# EAGLE board Schaltplan_Test (EAGLE 8.2.1)
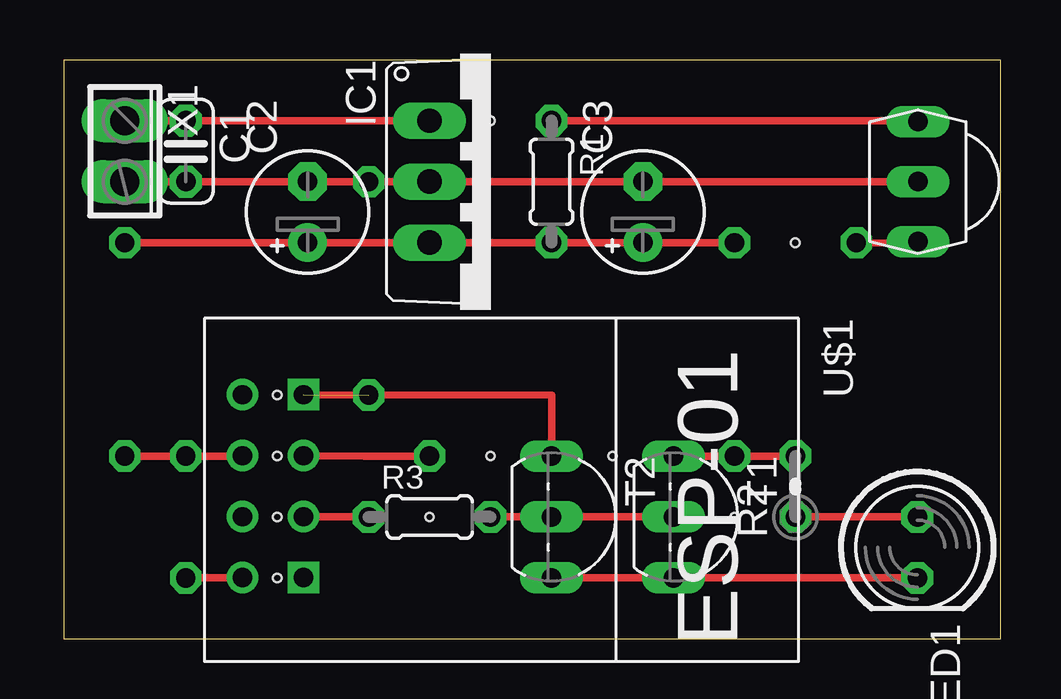
[diagram p0: board, top side]
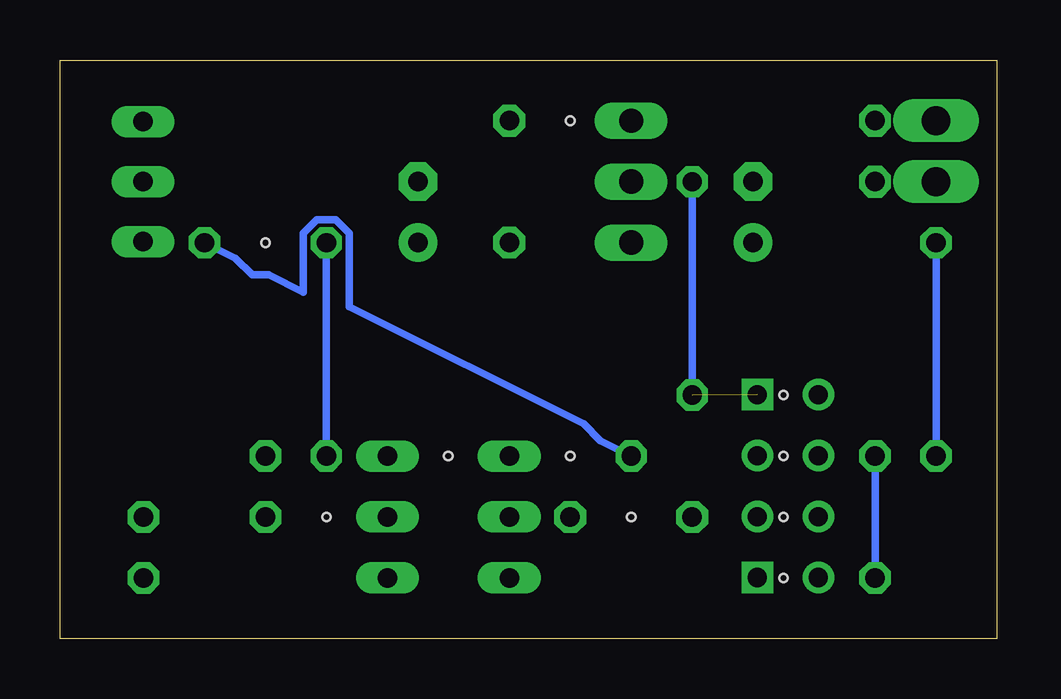
[diagram p1: board, bottom side, seen from below]

Size 39.04 x 24.12 mm. Coordinates in mm from the lower left corner, seen from the top.
Outline: 0,0 39.04,0 39.04,24.12 0,24.12 0,0
Copper layers (1*16): Top 0.035mm / dielectric 1.5mm / Bottom 0.035mm
Design rules "default": minimum track width 6mil, minimum drill 0.35mm, track to track 6mil, track to pad 6mil, pad to pad 6mil, via to via 6mil, smd to smd 6mil, copper to edge 40mil, drill to drill 6mil, minimum pad ring 10mil, minimum via ring 8mil, stop-mask expansion 4mil, vias tented up to drill 0mil, thermal gap 10mil
Holes 0.35 mm at 8.89,7.62 8.89,10.16 8.89,5.08 8.89,2.54 15.24,5.08 27.94,5.08 22.86,7.62 17.78,21.59 30.48,16.51 17.78,7.62

## Footprints (pad centres in the part's own frame; a part is rotated, then mirrored left to right if it is on the bottom)
C025-024X044 = drill 0.813 octagon: 1 -1.27,0; 2 1.27,0
E2,5-5 = drill 0.813 pad 1.6: + -1.27,0 | drill 0.813 pad 1.6 octagon: - 1.27,0
TO220V = drill 1.016 long: 1 -2.54,-2.54; 2 0,-2.54; 3 2.54,-2.54
TSOP18XX = drill 0.813 long: GND -0.001,-0.027; OUT -2.501,-0.027; VCC 2.499,-0.027
LED5MM = drill 0.813 octagon: A -1.27,0; K 1.27,0
0204/5 = drill 0.813 octagon: 1 -2.54,0; 2 2.54,0
0204V = drill 0.813 octagon: 1 -1.27,0; 2 1.27,0
TO92-EBC = drill 0.813 long: B 0,-1.27; C -2.54,-1.27; E 2.54,-1.27
ESP01 = drill 0.8: CH_PD -1.285,-8.178; GPIO0 1.255,-5.638; GPIO2 -1.285,-5.638; RST 1.255,-8.178; TX -3.825,-8.178; VCC 3.795,-8.178 | drill 0.8 square: GND -3.825,-5.638; RX 3.795,-5.638
2POL254 = drill 1.2 long: 1 -1.27,0; 2 1.27,0

## Placement (x,y rotation side)
C1  100 nF  [C025-024X044]  5.08,20.32 270 top
C2  2,2 µF  [E2,5-5]  10.16,17.78 90 top
C3  10 µF  [E2,5-5]  24.13,17.78 90 top
IC1  LF 33 CDT  [TO220V]  17.78,19.05 270 top
IR-TRANSMITTER  TSOP1833  [TSOP18XX]  35.56,19.05 90 top
LED1  IR-LED  [LED5MM]  35.56,3.81 270 top
R1  10  [0204/5]  20.32,19.05 270 top
R2  18  [0204V]  30.48,6.35 90 top
R3  1K  [0204/5]  15.24,5.08 0 top
T1  BC546A  [TO92-EBC]  26.67,5.08 270 top
T2  BC556A  [TO92-EBC]  21.59,5.08 270 top
U$1  ESP01  [ESP01]  15.62,6.35 270 top
X1  [2POL254]  2.54,20.32 270 top

## Library data of the parts
C1-C3 = rcl
IC1 = linear
IR-TRANSMITTER = tsop
LED1 = led
R1-R3 = resistor
T1 = transistor-npn
T2 = transistor-pnp
U$1 = esp8266modules
X1 = con-phoenix-254; OC_FARNELL: unknown; OC_NEWARK: unknown

## Nets
+3V3: C2.+ C3.+ IC1.3 R1.2 R2.2 T1.C U$1.CH_PD U$1.VCC
+5V: C1.1 IC1.1 X1.1
GND: C1.2 C2.- C3.- IC1.2 IR-TRANSMITTER.GND T2.C U$1.GND X1.2
N$1: IR-TRANSMITTER.VCC R1.1
N$2: R3.2 T1.B T2.B
N$8: LED1.K T1.E T2.E
N$10: LED1.A R2.1
VDD: R3.1 U$1.GPIO0
VSS: IR-TRANSMITTER.OUT U$1.GPIO2

## Tracks (layer width: path | path; a pad name or v marks a point on that pad's centre or on a via)
+3V3  (via drill 0.8 pad 1.3)
  Top 0.305: C2.+ v2.54,16.51 IC1.3 C3.+ R1.2 v27.94,16.51 | 5.09,7.63 v2.54,7.62 v5.08,7.62 U$1.CH_PD | v5.08,2.54 U$1.VCC | R2.2 v27.94,7.62 T1.C
  Bottom 0.305: v5.08,7.62 v5.08,2.54 | v2.54,16.51 v2.54,7.62 | v27.94,7.62 v27.94,16.51
+5V
  Top 0.305: X1.1 C1.1 IC1.1
GND  (via drill 0.8 pad 1.3)  (1 unrouted)
  Top 0.305: X1.2 C1.2 C2.- v12.7,19.05 IC1.2 C3.- IR-TRANSMITTER.GND | U$1.GND 20.32,10.16 T2.C
  Bottom 0.305: v12.7,19.05 v12.7,10.16
N$1
  Top 0.305: R1.1 35.59,21.59 IR-TRANSMITTER.VCC
N$2
  Top 0.305: R3.2 T2.B T1.B
N$8
  Top 0.305: T2.E T1.E LED1.K
N$10
  Top 0.305: R2.1 LED1.A
VDD
  Top 0.305: U$1.GPIO0 12.52,5.08 R3.1
VSS  (via drill 0.8 pad 1.3)
  Top 0.305: U$1.GPIO2 12.52,7.62 v15.24,7.62 | IR-TRANSMITTER.OUT 35.56,16.48 v33.02,16.51
  Bottom 0.305: v15.24,7.62 16.52,8.26 17.22,8.96 26.98,13.84 26.98,16.91 27.55,17.46 28.34,17.46 28.89,16.91 28.89,14.45 30.33,15.17 31.04,15.17 31.74,15.87 v33.02,16.51